# Altium PCB R2T_AVRPRG_PCB-V2.PcbDoc
Units mm, origin at the board's own origin, x right, y up, seen from the top; angles counter-clockwise.
Board outline 32.25 x 15.23 mm, 2 copper layers (Top Layer, Bottom Layer); 23 components, 20 nets, 87 pads, 26 vias.
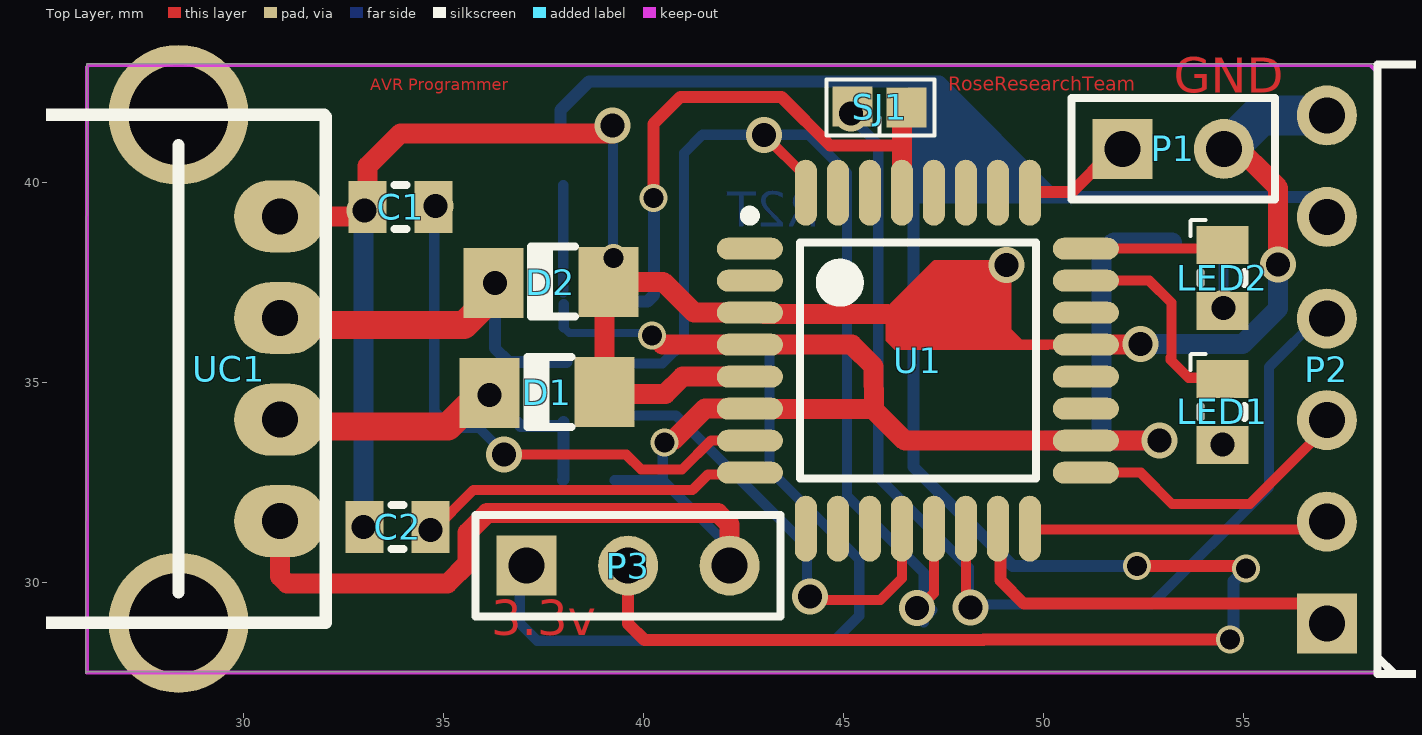
[diagram p0: Top Layer view]
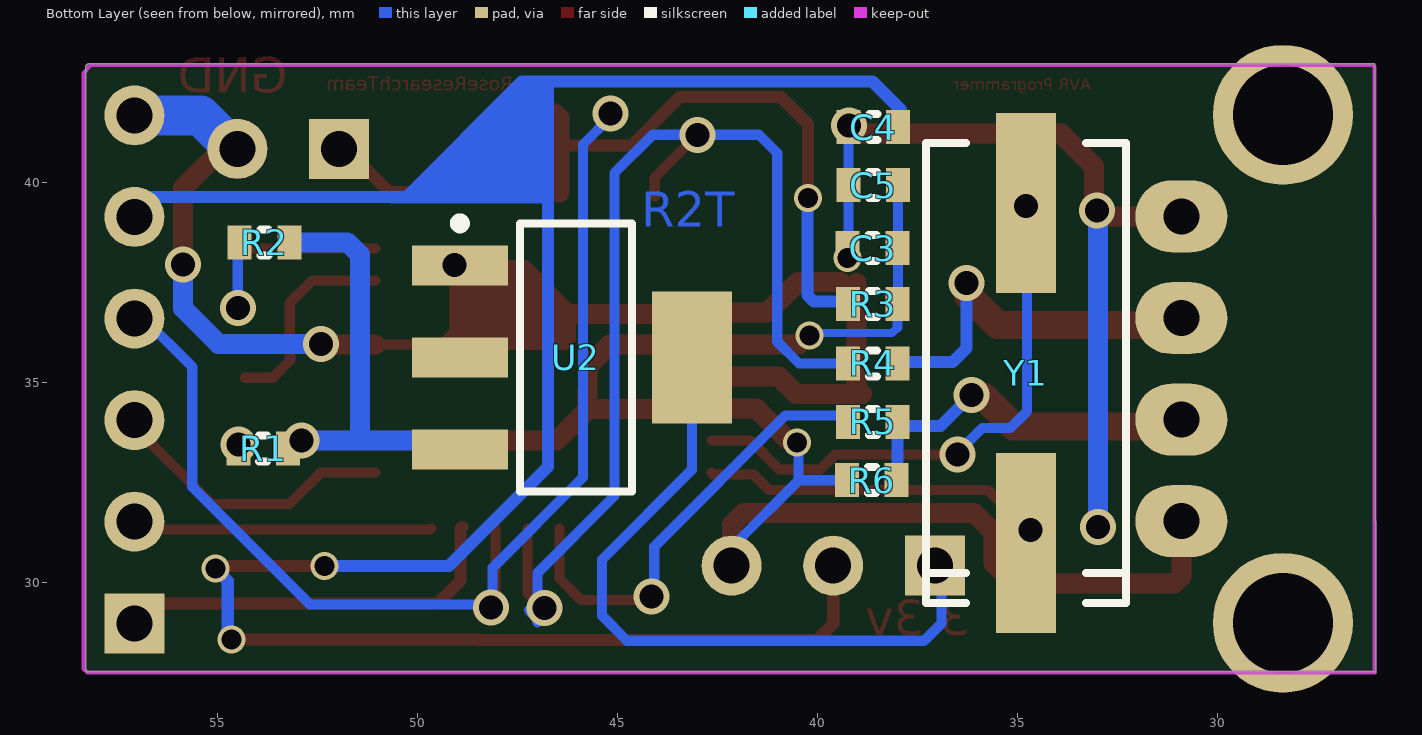
[diagram p1: Bottom Layer view, seen from below]

## Layer stack, top to bottom
Top Solder: solder mask 0.0102, Solder Resist, Dk 3.5
Top Layer: signal copper 0.0356
Dielectric1: dielectric 0.32, FR-4, Dk 4.8
Bottom Layer: signal copper 0.0356
Bottom Solder: solder mask 0.0102, Solder Resist, Dk 3.5

## Board outline
26.045,27.74 26.074,27.769 58.296,27.769 58.296,42.917 58.267,42.946 58.238,42.975 26.074,42.975

## Design rules (kind name [scope] priority, off if disabled: settings)
Clearance Clearance_2 [InPolygon] p1: gap=0.8
Clearance Clearance_1 [(OnLayer('Keep-Out Layer'))] p2: gap=0
Clearance [All] p3: gap=0.2
ComponentClearance [All] p1 off: gap=0.254 collisioncheckmode=3 verticalgap=0.254 showdistances=FALSE
HoleSize [All] p1: absolutevalues=TRUE maxlimit=5 minlimit=0.025 maxpercent=80.000 minpercent=20.000
MinimumSolderMaskSliver [All] p1 off: minsoldermaskwidth=0.254
PolygonConnect [All] p1: connectstyle=Relief reliefconductorwidth=0.254 reliefentries=4 polygonreliefangle="90 Angle" airgapwidth=0.254
RoutingVias [All] p1: holewidth=0.6 width=0.9 viastyle="Through Hole" minholewidth=0.5 minwidth=0.7 maxholewidth=1.5 maxwidth=1.8
SilkToBoardRegionClearance [All] p1 off:
SilkToSilkClearance [All] p1 off: silktosilkclearance=0.254
SilkToSolderMaskClearance [IsPad] p1 off: minsilkscreentomaskgap=0.254 clearancetoexposedcopper=TRUE
SolderMaskExpansion [All] p1: expansion=0.102
Width [All] p1: maxlimit=5 minlimit=0.1 preferedwidth=0.3
23 further rules are at their usual default settings.

## Components (designator, comment, footprint, x,y, rotation, side; value= is the part's Value field where it differs from the comment)
C1 "18pf" SMD_CAP_0805 33.093,39.393 r0 top
C2 "18pf" SMD_CAP_0805 33.02,31.395 r0 top
C3 "100nf" SMD_CAP_0603 38.622,38.361 r180 bottom
C4 "100nf" SMD_CAP_0603 38.605,41.387 r0 bottom
C5 "10uf" SMD_CAP_0603 38.607,39.941 r0 bottom
D1 "3.6v" DIOMELF3615N 37.641,34.769 r0 top
D2 "3.6v" DIOMELF3615N 37.734,37.525 r0 top
LED1 "LED" LED0805 54.414,34.265 r90 top
LED2 "LED" LED0805 54.418,37.619 r90 top
P1 "Header 2" HDR1X2 51.963,40.843 r0 top
P2 "Header 6H" HDR1X6H 57.076,28.984 r90 top
P3 "Header 3" HDR1X3 37.066,30.426 r0 top
R1 "1k" "RES 0603 (1608X06L)" 54.479,33.353 r180 bottom
R2 "1k" "RES 0603 (1608X06L)" 54.449,38.51 r180 bottom
R3 "10k" "RES 0603 (1608X06L)" 37.997,36.97 r0 bottom
R4 "56" "RES 0603 (1608X06L)" 39.241,35.481 r180 bottom
R5 "56" "RES 0603 (1608X06L)" 39.241,34.019 r180 bottom
R6 "2.2k" "RES 0603 (1608X06L)" 38.02,32.562 r0 bottom
SJ1 "SmdJumper" "SMD Jumper" 46.072,41.88 r270 top
U1 "ATmega8-16AI" 32A_N 46.85,35.55 r0 top
U2 "LM1117IMP-x.x" MP04A_N 46.04,35.632 r180 bottom
UC1 "Usb-A" "USB A Connector" 24.829,35.295 r0 top
Y1 "12 MHz" "Crystal SMD" 34.791,34.669 r90 bottom

## Footprints (in the part's own frame and the unit in brackets; to place one, negate y for a bottom-side part, rotate by r counter-clockwise, add the part's x,y. Pads: shape width x height; smd on the part's side, far side on the other; paste and mask are expansions set on the pad)
32A_N [mm] "Thin QFP, 32-Leads, Body 7x7mm, Pitch 0.8mm, IPC Medium Density"
  oval 1.65x0.55 smd: 1(-4.2,2.8) 2(-4.2,2) 3(-4.2,1.2) 4(-4.2,0.4) 5(-4.2,-0.4) 6(-4.2,-1.2) 7(-4.2,-2) 8(-4.2,-2.8) 17(4.2,-2.8) 18(4.2,-2) 19(4.2,-1.2) 20(4.2,-0.4) 21(4.2,0.4) 22(4.2,1.2) 23(4.2,2) 24(4.2,2.8)
  oval 0.55x1.65 smd: 9(-2.8,-4.2) 10(-2,-4.2) 11(-1.2,-4.2) 12(-0.4,-4.2) 13(0.4,-4.2) 14(1.2,-4.2) 15(2,-4.2) 16(2.8,-4.2) 25(2.8,4.2) 26(2,4.2) 27(1.2,4.2) 28(0.4,4.2) 29(-0.4,4.2) 30(-1.2,4.2) 31(-2,4.2) 32(-2.8,4.2)
  silkscreen extent -4.32,-2.95 2.95,3.75, body extent -3.5,-3.5 3.5,3.5, height 1.2
"Crystal SMD" [mm]
  rect 4.5x1.5 smd: 1(-3.683,0) 2(4.817,0)
  silkscreen extent -5.18,-2.5 6.32,2.5, body extent -5.64,-2.25 6.66,2.25, height 5.18
DIOMELF3615N [mm] "MELF Diode, 2-Leads, Body 3.6x1.5mm, IPC Medium Density"
  rect 1.5x1.75 smd: 1(-1.495,-0.03) 2(1.38,-0.005)
  silkscreen extent -0.55,-0.87 0.55,0.87, body extent -1.61,-0.83 1.54,0.67, height 1.45
HDR1X2 [mm] "Connector; Header; 2 Position"
  rect 1.5x1.5 hole 0.9: 1(0,0)
  round 1.5 hole 0.9: 2(2.54,0)
  silkscreen extent -1.27,-1.27 3.81,1.27
HDR1X3 [mm] "Connector; Header; 3 Position"
  rect 1.5x1.5 hole 0.9: 1(0,0)
  round 1.5 hole 0.9: 2(2.54,0) 3(5.08,0)
  silkscreen extent -1.27,-1.27 6.35,1.27
HDR1X6H [mm] "Connector; Header; 6 Position; Right Angle"
  rect 1.5x1.5 hole 0.9: 1(0,0)
  round 1.5 hole 0.9: 2(2.54,0) 3(5.08,0) 4(7.62,0) 5(10.16,0) 6(12.7,0)
  silkscreen extent -1.27,-6.35 13.97,-1.27
LED0805 [mm]
  rect 0.95x1.3 smd: 1(-0.822,-0.047) 2(0.828,-0.047)
  silkscreen extent -0.15,-0.6 1.45,0.75, body extent -1.03,-0.68 1.02,0.59, height 1.1
MP04A_N [mm] "SOT223, 4-Leads, Body 6.5x3.5mm, Pitch 2.3mm, Lead Span 7mm, IPC Medium Density"
  rect 2.4x1 smd: 1(-2.9,2.3) 2(-2.9,0) 3(-2.9,-2.3)
  rect 2x3.3 smd: 4(2.9,0)
  silkscreen extent -3.03,-3.35 1.4,3.47, body extent -1.85,-3.35 1.85,3.35, height 1.8
"RES 0603 (1608X06L)" [mm] "Chip Resistor, 2-Leads, Body 1.6x0.8mm, IPC High Density _ (0.063W)"
  rect 0.6x0.85 smd: 1(0,0) 2(1.244,0)
  silkscreen extent 0.52,-0.33 0.72,0.33, body extent -0.14,-0.38 1.38,0.38, height 0.45
"SMD Jumper" [mm]
  rect 1x1 smd: 1(0,0.5) 2(-0.025,-0.85)
  silkscreen extent -0.7,-1.5 0.7,1.2
SMD_CAP_0603 [mm]
  rect 0.6x0.85 smd: 1(-0.622,0) 2(0.622,0)
  silkscreen extent -0.1,-0.33 0.1,0.33, body extent -0.76,-0.38 0.76,0.38, height 0.6
SMD_CAP_0805 [mm]
  rect 0.95x1.3 smd: 1(0,0) 2(1.65,0)
  silkscreen extent 0.67,-0.55 0.97,0.55, body extent -0.19,-0.64 1.84,0.63, height 0.65
"USB A Connector" [mm]
  oval 2.3x1.8 hole 0.9: 1(6.077,-3.759) 2(6.077,-1.219) 3(6.077,1.321) 4(6.077,3.861)
  round 3.5 hole 2.5: 5(3.537,6.401) 6(3.537,-6.299)
  silkscreen extent -7.42,-6.3 7.22,6.4, body extent -14.01,-5.86 4.32,6.13, height 4.5

## Part data
C1 C2 C3 C4 C5: library part Cap-Bipolar, "Bipolar Capacitor"
D1 D2: library part "Diode Zener SMD"
P1: "Header, 2-Pin"
P2: "Header, 6-Pin, Right Angle"
P3: "Header, 3-Pin"
R1 R2 R3 R4 R5 R6: library part Resistor, "Resistor"
U1: "8-Bit AVR Microcontroller with 8K Bytes of In-System Programmable Flash Memory"
U2: "x.x Volt, 800mA Low-Dropout Linear Regulator, 4-pin SOT-223"
UC1: library part USB
Y1: library part XTAL, "XTAL Crystal"

## Via types
v1: diameter 0.9, hole 0.6, Top Layer to Bottom Layer, 19 vias
v2: diameter 0.7, hole 0.5, Top Layer to Bottom Layer, 7 vias

## Nets (pads, with @x,y where several pads share a name; then routed paths per layer and width w, separated by ;. In a path a pad name is that pad's centre, name@x,y a point inside that pad or via, vN(x,y) a via of type N, cw(c..) or ccw(c..) an arc to the next point about the centre after c; other vN are vias at no path point)
GND: C1.1 C2.1 C3.1 C4.2 C5.2 D1.2 D2.2 P1.2 P2.6 U1.3 U1.5 U1.21 U2.1 UC1.4 | length 54.1
  Top Layer w0.254: C1.1@32.863,39.152 v1(33.018,39.307) ; v1(32.99,31.395) C2.1 ; v1@39.21,41.234 v1(39.21,41.43) ; 46.073,36.716 47.292,37.936 v1(49.07,37.936) 49.07,36.279 49.4,35.95 U1.21 ; v1(52.415,35.968) v1@52.433,35.95
  Top Layer w0.5: UC1.4@31.069,39.152 C1.1@32.863,39.152 ; C1.1 33.093,40.411 33.916,41.234 v1@39.21,41.234 ; D1.2@38.888,34.721 40.537,34.721 40.966,35.15 U1.5 ; D1.2 D2.2@39.021,37.496 ; D2.2@39.42,37.523 40.484,37.523 41.257,36.75 U1.3 ; U1.3@42.997,36.716 46.073,36.716 ; U1.21 v1@52.433,35.95 ; P1.2@54.597,41.131 55.857,39.871 v1(55.857,37.958)
  Bottom Layer w0.254: v1@32.99,39.279 v1(33.018,39.307) ; C3.1@39.227,38.361 C4.2 ; v2(39.244,38.118) C3.1
  Bottom Layer w0.5: v1(32.99,31.395) v1@32.99,39.279 ; v1(52.415,35.968) 54.97,35.968 55.857,36.854 v1(55.857,37.958)
  Bottom Layer w1: P1.2@54.752,41.01 55.426,41.684 P2.6
NetC1_2: C1.2 U1.7 Y1.2 | length 13.8
  Top Layer w0.254: v1(36.502,33.202) 39.558,33.202 39.931,32.829 40.956,32.829 41.684,33.557 42.643,33.557 U1.7
  Bottom Layer w0.254: Y1.2@34.76,39 34.76,34.288 35.182,33.866 35.878,33.866 v1@36.542,33.202 ; v1(34.791,39.42) Y1.2 ; v1(36.502,33.202) v1@36.649,33.202
NetC2_2: C2.2 U1.8 Y1.1 | length 8.7
  Top Layer w0.254: C2.2@34.682,31.258 35.743,32.32 41.22,32.32 41.607,32.706 42.606,32.706 U1.8
  Top Layer w0.7: v1(34.67,31.321) C2.2
NetD1_1: D1.1 R5.2 R6.1 UC1.2 | length 9
  Top Layer w0.7: UC1.2@30.917,33.901 35.099,33.901 35.854,34.656 D1.1@36.051,34.656 ; v1(36.146,34.696) D1.1
  Bottom Layer w0.3: v1(36.146,34.696) 36.919,33.923 R5.2@37.915,33.923 ; R6.1@37.975,32.561 37.997,32.583 R5.2
NetD2_1: D2.1 R4.2 UC1.3 | length 9.5
  Top Layer w0.7: UC1.3@30.917,36.441 35.501,36.441 36.239,37.18 D2.1@36.239,37.402 ; D2.1 v1(36.277,37.495)
  Bottom Layer w0.3: v1(36.277,37.495) 36.277,35.862 36.622,35.517 R4.2@38.07,35.517
NetLED1_1: LED1.1 R1.1 | length 0
  Top Layer w0.254: LED1.1 v1(54.47,33.452)
NetLED1_2: LED1.2 U1.23 | length 5.1
  Top Layer w0.254: U1.23 52.638,37.55 53.192,36.996 53.192,35.646 53.173,35.627 53.173,35.567 53.616,35.124 LED1.2@54.311,35.124
NetLED2_1: LED2.1 R2.1 | length 1.7
  Bottom Layer w0.254: R2.1 54.492,38.466 v1(54.492,36.871)
NetLED2_2: LED2.2 U1.24 | length 3.4
  Top Layer w0.254: U1.24 LED2.2@54.427,38.35
NetP1_1: P1.1 U1.25 | length 2.8
  Top Layer w0.3: U1.25@49.78,39.764 50.701,39.764 51.703,40.766 51.703,40.794 P1.1@51.982,41.072
NetP3_1: P3.1 U2.4 | length 17.8
  Bottom Layer w0.254: P3.1@36.897,30.44 36.897,28.987 37.335,28.549 44.761,28.549 45.384,29.172 45.384,30.579 43.14,32.822 U2.4
NetR3_2: R3.2 SJ1.1 U1.29 | length 14.2
  Top Layer w0.3: v2(40.239,39.62) 40.239,41.467 40.912,42.14 43.442,42.14 44.657,40.925 46.427,40.925 46.45,40.902
  Top Layer w0.5: U1.29 46.45,40.902 SJ1.1@46.45,41.618 ; SJ1.1@46.569,41.686 SJ1.1@46.569,41.734
  Bottom Layer w0.3: R3.2@39.343,37.031 40.093,37.031 40.252,37.19 v2@40.252,39.62
TARGETMISO: P2.2 U1.16 | length 7.7
  Top Layer w0.254: U1.16 49.671,31.329 57.238,31.329 P2.2@57.283,31.374
TARGETMOSI: P2.1 U1.15 | length 10
  Top Layer w0.3: U1.15@48.88,31.392 48.921,31.351 48.921,30.053 49.5,29.474 56.586,29.474 P2.1
TARGETRESET: P2.4 SJ1.2 U1.14 | length 29
  Top Layer w0.254: U1.14 48.05,29.529 v1@48.121,29.457
  Bottom Layer w0.254: v1(45.177,41.727) 45.165,41.715 45.165,41.652 45.862,40.955 45.862,32.633 48.121,30.374 48.121,29.457 52.693,29.457 55.633,32.397 55.633,35.394 56.904,36.665 P2.4@56.923,36.665
  other v1: 48.161,29.376
TARGETSCK: P2.3 U1.17 | length 7.3
  Top Layer w0.254: U1.17 52.421,32.75 53.205,31.966 55.146,31.966 57.029,33.849 P2.3@57.029,34.07
TARGETSUPPLY: C4.1 P2.5 P3.2 | length 58.6
  Top Layer w0.305: P3.2 39.606,28.973 40.015,28.564 48.485,28.564 48.496,28.576 v2(54.653,28.576) ; v2(52.324,30.414) 55.117,30.414 v2(55.055,30.352)
  Bottom Layer w0.305: C4.1@37.914,41.314 37.914,41.82 38.626,42.531 46.704,42.531 ; v2(52.324,30.414) 49.22,30.414 46.738,32.896 46.738,42.489 46.688,42.489 46.732,42.532 47.39,42.532 50.284,39.638 P2.5@56.751,39.638 ; v2@54.745,28.521 54.745,30.041 v2(55.055,30.352)
USB_D+: R4.1 U1.13 U1.32 | length 28
  Top Layer w0.254: v1(43.001,41.197) 44.068,40.131 U1.32@44.068,39.66 ; v1@47.021,29.12 47.021,29.22 46.958,29.283 46.958,29.444 47.25,29.736 U1.13
  Bottom Layer w0.254: R4.1 40.464,35.481 41.008,36.025 41.008,40.741 41.464,41.197 44.122,41.197 45.075,40.245 45.075,32.174 46.997,30.251 v1@46.997,29.008 ; v1@47.021,29.12 v1@47.215,29.314
  other v1: 46.825,29.367
USB_D-: R5.1 U1.12 | length 11.2
  Top Layer w0.254: v1@44.284,29.57 45.916,29.57 46.45,30.105 U1.12
  Bottom Layer w0.254: R5.1@39.245,34.018 39.41,34.183 40.799,34.183 44.082,30.9 v1@44.082,29.594
  other v1: 44.153,29.653
VCC: C3.2 C5.1 P3.3 R1.2 R2.2 R3.1 R6.2 U1.4 U1.6 U1.18 U2.3 UC1.1 | length 54.9
  Top Layer w0.203: v2(40.202,36.177) v2@40.202,36.211
  Top Layer w0.254: v2@40.114,36.229 v2@40.167,36.176 ; v2@40.216,36.203 40.469,35.95 ; v2(40.511,33.506) 40.511,33.562 v2@40.736,33.562 ; 45.756,34.347 45.812,34.261
  Top Layer w0.5: UC1.1 30.906,30.157 31.082,29.981 35.093,29.981 35.596,30.484 35.596,31.255 36.084,31.743 41.854,31.743 42.14,31.457 P3.3@42.14,30.673 ; 40.469,35.95 U1.4 45.2,35.95 45.742,35.408 45.756,34.347 U1.6@42.778,34.347 ; v2@40.736,33.562 41.524,34.35 U1.6 ; 45.812,34.261 46.523,33.55 U1.18 v1(52.894,33.55)
  Bottom Layer w0.203: 37.997,36.383 38.136,36.244 40.107,36.244 40.174,36.177 v2(40.202,36.177)
  Bottom Layer w0.254: R3.1@37.985,37.255 C5.1 ; 37.997,36.383 R3.1 ; R6.2 40.471,32.562 42.077,30.956 P3.3@42.077,30.453 ; 40.473,32.585 40.473,33.468 v2(40.511,33.506) ; P3.3@42.492,30.245 P3.3@42.667,30.42
  Bottom Layer w0.5: U2.3@50.062,33.55 51.441,33.55 ; v1(52.894,33.55) 51.441,33.55 ; R2.2 51.748,38.51 51.441,38.203 51.441,33.55
pads on no net: U1.1 U1.2 U1.9 U1.10 U1.11 U1.19 U1.20 U1.22 U1.26 U1.27 U1.28 U1.30 U1.31 U2.2 UC1.5 UC1.6
copper on no net: | length 0.1
  Top Layer w0.254: 42.275,0.1 42.375,0

## Keep-outs
Keep-Out Layer:
  lines w0.1: 26.077,27.749 58.253,27.749 58.35,27.845 58.35,42.745 58.157,42.937 26.127,42.937 26.077,42.888 26.077,27.749

## Other copper
Top Layer:
  region net GND: 50.139,35.839 50.127,35.827 46.266,35.827 46.05,36.044 46.05,36.753 47.265,37.968 47.337,37.896 49.032,37.896 49.032,36.38 49.369,36.044 49.369,35.936 50.055,35.936 50.103,35.984
  text "AVR Programmer" at 33.155,42.207 h0.5
  text "RoseResearchTeam" at 47.604,42.173 h0.6
  text "GND" at 53.246,41.955 h1.5
  text "3.3v" at 36.186,28.397 h1.5
Bottom Layer:
  region net TARGETSUPPLY: 50.694,39.44 50.643,39.491 46.729,39.491 46.729,42.432 46.883,42.586 47.445,42.586
  text "R2T" at 44.407,38.608 h1.5